# Altium PCB HU_revC.PcbDoc (part 2 of 5)
Units mm, origin at the board's own origin, x right, y up, seen from the top; angles counter-clockwise.
Board outline 391 x 236 mm, 6 copper layers (Top Layer, Layer 1, Layer 2, Layer 3, Layer 4, Bottom Layer), stack 1.538 mm thick; 737 components, 574 nets, 2599 pads, 143 vias.
Unrouted connection lines stored in the file: 1682.
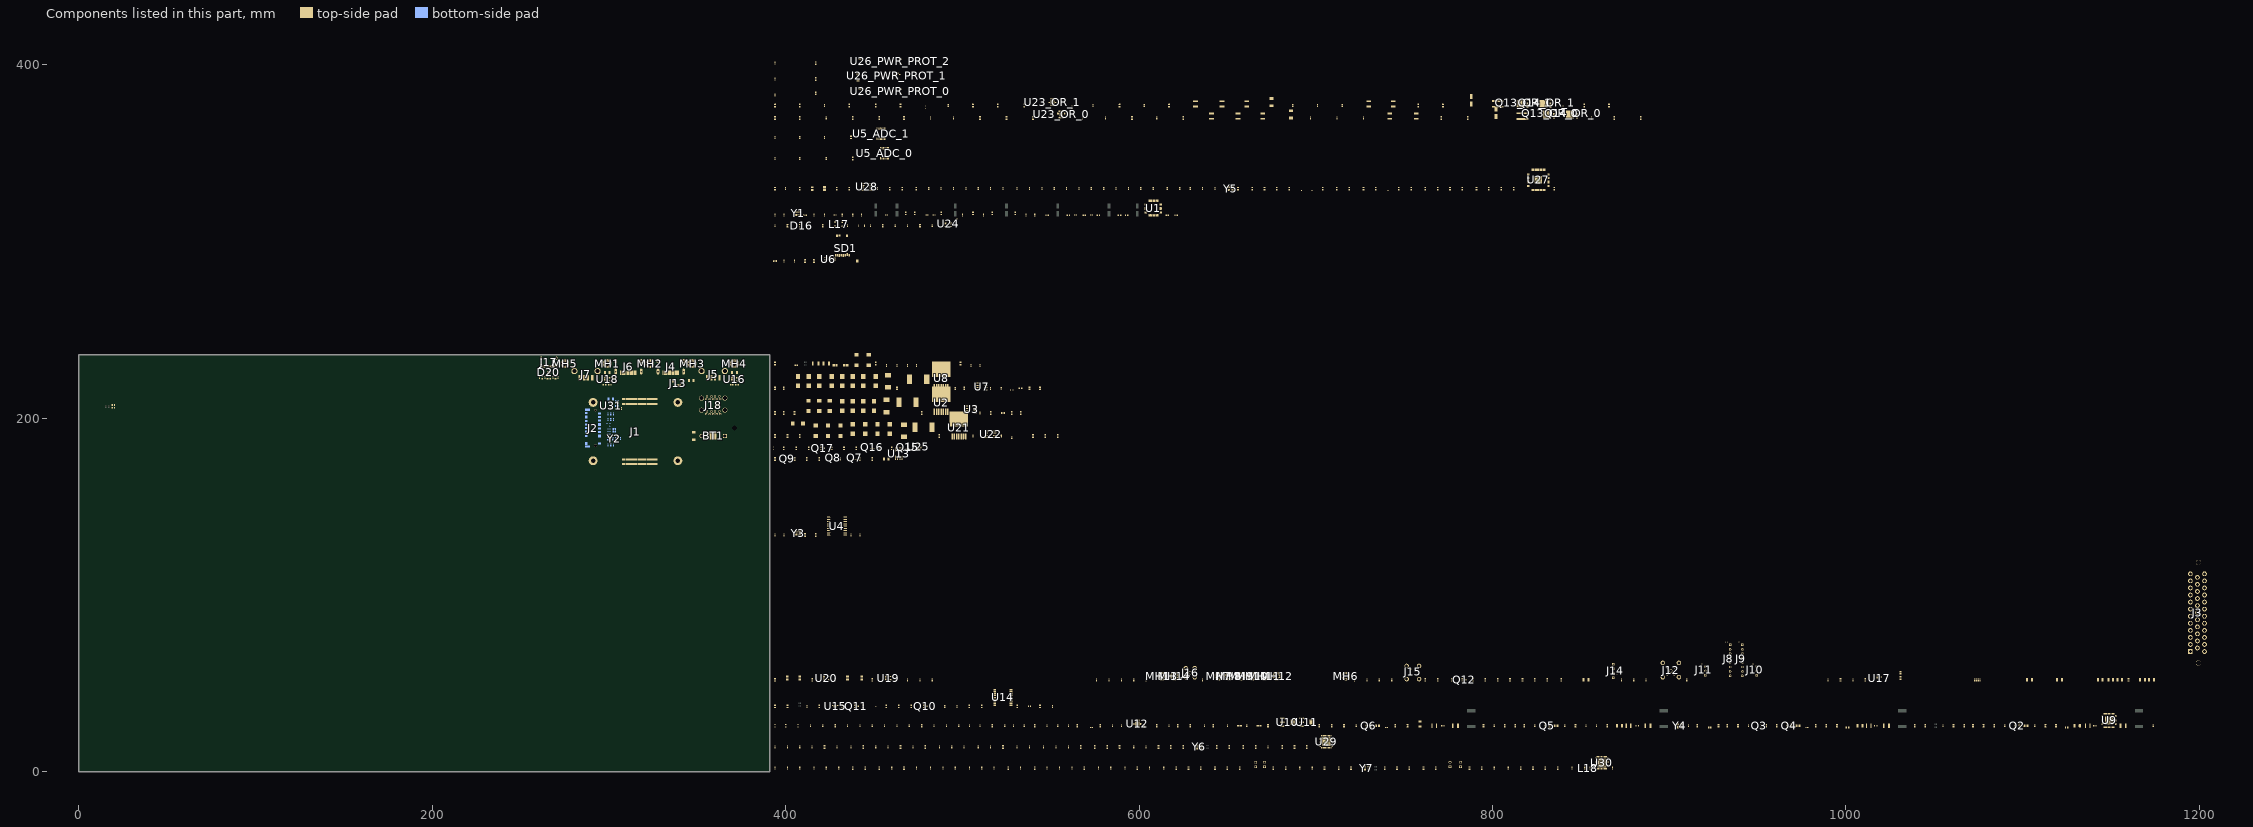
[diagram p2: the components of this part, seen from the top]

## Components (designator, comment, footprint, x,y, rotation, side; value= is the part's Value field where it differs from the comment) (continued)
R110 "0" R0603B 610.001,26 r90 top
R111 "0" R0603B 603.001,26 r90 top
R112 "0" R0603B 578.001,26 r90 top
R113 "100k" R0603B 565.001,26 r90 top
R114 "0" R0603B 541.001,26 r90 top
R115 "100k" R0603B 517.001,26 r90 top
R116 "0" R0603B 477.001,26 r90 top
R117 "TBD" R0603B 428.001,26 r90 top value=100k
R118 "1k" R0603B 449.001,177 r90 top
R119 "100k" R0603B 442.001,177 r90 top
R120 "100k" R0603B 419.001,177 r90 top
R121 "1k" R0603B 412.001,177 r90 top
R122 "1k" R0603B 405.001,177 r90 top
R123 "100k" R0603B 394.001,177 r90 top
R124 "0402 JUMPER" RESC1005X40X25ML05T05 551.001,37 r90 top
R125 "100k" R0603B 544.001,37 r90 top
R126 "1k" R0603B 531.001,37 r90 top
R127 "100k" R0603B 511.001,37 r90 top
R128 "10" R0603B 504.001,37 r90 top
R129 "560" R0603B 471.001,37 r90 top
R130 "100k" R0603B 464.001,37 r90 top
R131 "100k" R0603B 457.001,37 r90 top
R132 "1k" R0603B 444.001,37 r90 top
R133 "100k" R0603B 432.001,37 r90 top
R134 "1k" R0603B 419.001,37 r90 top
R135 "1k" R0603B 401.001,37 r90 top
R136 "1k" R0603B 394.001,37 r90 top
R137 "1k" R0603B 1160.001,52 r90 top
R138 "1k" R0603B 372.5,219 r0 top
R139 "100k" R0603B 369.5,219 r0 top
R140 "0402 JUMPER" RESC1005X40X25ML05T05 1076,52 r90 top
R141 "0402 JUMPER" RESC1005X40X25ML05T05 1075.001,52 r90 top
R142 "0402 JUMPER" RESC1005X40X25ML05T05 1074,52 r90 top
R143 "0402 JUMPER" RESC1005X40X25ML05T05 1073,52 r90 top
R144 "1k" R0603B 1031,56 r270 top
R145 "ERT-J1VR103J" RESC1608X90X30ML15T20 1031.001,53 r90 top
R146 "0402 JUMPER" RESC1005X40X25ML05T05 1023.001,52 r90 top
R147 "100k" R0603B 1011.001,52 r90 top
R148 "0402 JUMPER" RESC1005X40X25ML05T05 1004.001,52 r90 top
R149 "17.5k" R0603B 997.001,52 r90 top value=100k
R150 "1k" R0603B 300.5,219 r0 top
R151 "100k" R0603B 297.5,219 r0 top
R152 "0" R0603B 831.001,52 r90 top
R153 "1k" R0603B 839.001,52 r90 top
R154 "100k" R0603B 817.001,52 r90 top
R155 "100k" R0603B 824.001,52 r90 top
R156 "1k" R0603B 803.001,52 r90 top
R157 "1k" R0603B 810.001,52 r90 top
R158 "DNP" R0603B 796.001,52 r90 top
R159 "1k" R0603B 789.001,52 r90 top
R160 "100k" R0603B 769.001,52 r90 top
R161 "100k" R0603B 777.001,52 r90 top
R162 "100k" R0603B 762.001,52 r90 top
R163 "0402 JUMPER" RESC1005X40X25ML05T05 604.001,52 r90 top
R164 "0402 JUMPER" RESC1005X40X25ML05T05 597.001,52 r90 top
R165 "27" R0603B 266.75,223 r270 top
R166 "27" R0603B 265.25,223 r270 top
R167 "0402 JUMPER" RESC1005X40X25ML05T05 271.25,223 r90 top
R168 "0402 JUMPER" RESC1005X40X25ML05T05 260.75,223 r90 top
R169 "DNP" R0603B 269.75,223 r270 top
R170 "DNP" R0603B 262.25,223 r270 top
R171 "0402 JUMPER" RESC1005X40X25ML05T05 483.001,52 r90 top
R172 "0402 JUMPER" RESC1005X40X25ML05T05 476.001,52 r90 top
R173 "0402 JUMPER" RESC1005X40X25ML05T05 469.001,52 r90 top
R174 "0402 JUMPER" RESC1005X40X25ML05T05 462.001,52 r90 top
R175 "1k" R0603B 449.001,52 r90 top
R176 "100k" R0603B 428.001,52 r90 top
R177 "1k" R0603B 415.001,52 r90 top
R178 "100k" R0603B 394.001,52 r90 top
R179 "1k" R0603B 554.001,190 r90 top
R180 "DNP" R0603B 547.001,190 r90 top
R181 "ERT-J1VR103J" RESC1608X90X30ML15T20 540.001,190 r90 top
R182 "DNP" RESC1005X40X25ML05T05 528.001,189 r90 top
R183 "1k" R0603B 487.001,190 r90 top
R184 "100k" R0603B 408.001,190 r90 top
R185 "100k" R0603B 401.001,190 r90 top
R186 "24k" R0603B 394.001,190 r90 top
R187_OR_0 "100k" R0603B 884.001,370 r90 top (schematic designator R187)
R187_OR_1 "100k" R0603B 866.001,377 r90 top (schematic designator R187)
R188_OR_0 "24k" R0603B 869.001,370 r90 top (schematic designator R188)
R188_OR_1 "24k" R0603B 852.001,377 r90 top (schematic designator R188)
R189_OR_0 "KRL6432E-M-R003-F-T1" FP-KRL6432E-MFG 817.001,371 r90 top (schematic designator R189)
R189_OR_1 "KRL6432E-M-R003-F-T1" FP-KRL6432E-MFG 803.001,378 r90 top (schematic designator R189)
R190_OR_0 "DNP" R0603B 771.001,370 r90 top (schematic designator R190)
R190_OR_1 "DNP" R0603B 758.001,377 r90 top (schematic designator R190)
R191_OR_0 "49.9" R0603B 786.001,370 r90 top (schematic designator R191)
R191_OR_1 "49.9" R0603B 772.001,377 r90 top (schematic designator R191)
R192_OR_0 "10" R0603B 625.001,370 r90 top (schematic designator R192)
R192_OR_1 "10" R0603B 617.001,377 r90 top (schematic designator R192)
R193_OR_0 "100k" R0603B 596.001,370 r90 top (schematic designator R193)
R193_OR_1 "100k" R0603B 589.001,377 r90 top (schematic designator R193)
R194_OR_0 "100k" R0603B 540.001,370 r90 top (schematic designator R194)
R194_OR_1 "100k" R0603B 535.001,377 r90 top (schematic designator R194)
R195_OR_0 "100k" R0603B 525.001,370 r90 top (schematic designator R195)
R195_OR_1 "100k" R0603B 520.001,377 r90 top (schematic designator R195)
R196_OR_0 "11.5k" R0603B 510.001,370 r90 top (schematic designator R196)
R196_OR_1 "11.5k" R0603B 506.001,377 r90 top (schematic designator R196)
R197_OR_0 "DNP" R0603B 438.001,370 r90 top (schematic designator R197)
R197_OR_1 "DNP" R0603B 436.001,377 r90 top (schematic designator R197)
R198_OR_0 "5.1k" R0603B 453.001,370 r90 top (schematic designator R198)
R198_OR_1 "5.1k" R0603B 451.001,377 r90 top (schematic designator R198)
R199_OR_0 "8.2k" R0603B 467.001,370 r90 top (schematic designator R199)
R199_OR_1 "8.2k" R0603B 465.001,377 r90 top (schematic designator R199)
R200_OR_0 "100k" R0603B 408.001,370 r90 top (schematic designator R200)
R200_OR_1 "100k" R0603B 408.001,377 r90 top (schematic designator R200)
R201_OR_0 "3.6k" R0603B 394.001,370 r90 top (schematic designator R201)
R201_OR_1 "3.6k" R0603B 394.001,377 r90 top (schematic designator R201)
R202 "100k" R0603B 476.001,309 r90 top
R203 "1k" R0603B 455.001,309 r90 top
R204 "60.4" R0603B 421.001,309 r90 top
R205 "60.4" R0603B 401.001,309 r90 top
R206 "100k" R0603B 460.001,183 r90 top
R207 "100k" R0603B 440.001,183 r90 top
R208 "1k" R0603B 433.001,183 r90 top
R209 "1k" R0603B 426.001,183 r90 top
R210 "100k" R0603B 413.001,183 r90 top
R211 "100k" R0603B 406.001,183 r90 top
R212 "24k" R0603B 399.001,183 r90 top
R213_PWR_PROT_0 "100k" R0603B 417.001,384 r90 top (schematic designator R213)
R213_PWR_PROT_1 "100k" R0603B 417.001,392 r90 top (schematic designator R213)
R213_PWR_PROT_2 "100k" R0603B 417.001,401 r90 top (schematic designator R213)
R214 "90.9k" R0603B 835.001,330 r90 top
R215 "JMP" R0603B 812.001,330 r90 top
R216 "JMP" R0603B 805.001,330 r90 top
R217 "JMP" R0603B 798.001,330 r90 top
R218 "10k" R0603B 791.001,330 r90 top
R219 "JMP" R0603B 776.001,330 r90 top
R220 "JMP" R0603B 783.001,330 r90 top
R221 "JMP" R0603B 769.001,330 r90 top
R222 "JMP" R0603B 762.001,330 r90 top
R223 "JMP" R0603B 754.001,330 r90 top
R224 "JMP" R0603B 747.001,330 r90 top
R225 "JMP" R0603B 734.001,330 r90 top
R226 "DNP" R0603B 704.001,330 r90 top
R227 "DNP" R0603B 712.001,330 r90 top
R228 "10k" R0603B 719.001,330 r90 top
R229 "DNP" R0603B 727.001,330 r90 top
R230 "DNP" R0603B 664.001,330 r90 top
R231 "DNP" R0603B 671.001,330 r90 top
R232 "DNP" R0603B 678.001,330 r90 top
R233 "DNP" R0603B 685.001,330 r90 top
R234 "1M" R0603B 656.001,330 r90 top
R235 "DNP" R0603B 474.001,330 r90 top
R236 "DNP" R0603B 466.001,330 r90 top
R237 "9.53k" R0603B 459.001,330 r90 top
R238 "100k" R0603B 429.001,330 r90 top
R239 "16.9k" R0603B 436.001,330 r90 top
R240 "100k" R0603B 408.001,330 r90 top
R241 "10k" R0603B 394.001,330 r90 top
R242 "100k" R0603B 695.001,14 r90 top
R243 "4.7k" R0603B 688.001,14 r90 top
R244 "4.7k" R0603B 681.001,14 r90 top
R245 "4.7k" R0603B 666.001,14 r90 top
R246 "1k" R0603B 659.001,14 r90 top
R247 "1k" R0603B 651.001,14 r90 top
R248 "1k" R0603B 644.001,14 r90 top
R249 "1k" R0603B 625.001,14 r90 top
R250 "1k" R0603B 618.001,14 r90 top
R251 "1k" R0603B 611.001,14 r90 top
R252 "1k" R0603B 589.001,14 r90 top
R253 "1k" R0603B 582.001,14 r90 top
R254 "1k" R0603B 575.001,14 r90 top
R255 "JUMP" R0603B 567.001,14 r90 top value=0
R256 "JUMP" R0603B 523.001,14 r90 top value=0
R257 "JUMP" R0603B 479.001,14 r90 top value=0
R258 "JUMP" R0603B 465.001,14 r90 top value=0
R259 "6.04k" R0603B 444.001,14 r90 top
R260 "JUMP" R0603B 422.001,14 r90 top value=0
R261 "1k" R0603B 830.001,2 r90 top value=100k
R262 "1k" R0603B 837.001,2 r90 top value=100k
R263 "100k" R0603B 816.001,2 r90 top
R264 "100k" R0603B 823.001,2 r90 top
R265 "100k" R0603B 787.001,2 r90 top
R266 "4.7k" R0603B 794.001,2 r90 top value=100k
R267 "10k" R0603B 768.001,2 r90 top value=100k
R268 "10k" R0603B 761.001,2 r90 top value=100k
R269 "1k" R0603B 746.001,2 r90 top value=100k
R270 "1k" R0603B 753.001,2 r90 top value=100k
R271 "10k" R0603B 739.001,2 r90 top value=100k
R272 "10k" R0603B 720.001,2 r90 top value=100k
R273 "1k" R0603B 713.001,2 r90 top value=100k
R274 "10k" R0603B 705.001,2 r90 top value=100k
R275 "1k" R0603B 683.001,2 r90 top value=100k
R276 "10k" R0603B 676.001,2 r90 top value=100k
R277 "1k" R0603B 657.001,2 r90 top value=100k
R278 "1k" R0603B 643.001,2 r90 top value=100k
R279 "1k" R0603B 650.001,2 r90 top value=100k
R280 "DNP" R0603B 635.001,2 r90 top value=100k
R281 "JUMP" R0603B 628.001,2 r90 top value=0
R282 "JUMP" R0603B 621.001,2 r90 top value=0
R283 "4.7k" R0603B 599.001,2 r90 top value=100k
R284 "JUMP" R0603B 569.001,2 r90 top value=0
R285 "JUMP" R0603B 541.001,2 r90 top value=0
R286 "JUMP" R0603B 526.001,2 r90 top value=0
R287 "JUMP" R0603B 467.001,2 r90 top value=0
R288 "JUMP" R0603B 453.001,2 r90 top value=0
R289 "12.1k" R0603B 438.001,2 r90 top value=100k
R290 "200" R0603B 445.001,2 r90 top value=100k
SD1 "473521001" MOLX-473521001_V 434.001,296 r0 top
SW1 "KXT331LHS" FP-KXT331LHS-MFG 443.001,309 r0 top
TP1 "TPAD6R" "New footprint 1" 299,197 r90 bottom
TP2 "TPAD6R" "New footprint 1" 300.5,197 r90 bottom
TP3 "TPAD6R" "New footprint 1" 300.5,195.5 r90 bottom
TP4 "TPAD6R" "New footprint 1" 451.001,37 r90 top
TP5 "TPAD6R" "New footprint 1" 741.001,329 r90 top
TP6 "TPAD6R" "New footprint 1" 698.001,329 r90 top
TP7 "TPAD6R" "New footprint 1" 692.001,329 r90 top
U1 "CM6206" CQFP50P900X900X160-48N 608.001,319 r0 top
U2 "LM2678S-5.0" KTW0007B_N 488.001,210 r90 top
U3 "ACS711KLCTR-12AB-T" FP-LC-8-IPC_C 505.001,205 r0 top
U4 "MCP2515-I/SO" FP-C04-051-MFG 429.001,139 r0 top
U5_ADC_0 "" MTC16_L 456.001,350 r90 top (schematic designator U5)
U5_ADC_1 "" MTC16_L 454.001,361 r90 top (schematic designator U5)
U6 "AP22804AW5-7" SOT95P285X140-5N 424.001,290 r0 top
U7 "ACS711KLCTR-12AB-T" FP-LC-8-IPC_C 511.001,218 r0 top
U8 "LM2678S-3.3/NOPB" KTW0007B_N 488.001,224 r90 top
U9 "MAX96724FGTN/V+" MAX96724FGTN_V+-Footprint-1 1149.001,29 r0 top
U10 "LD1117S18TR" SOT-223_M 684.001,28 r0 top
U11 "LD1117S12TR" SOT-223_M 695.001,28 r0 top
U12 "PAC1934T-I/JQ" FP-C04-257-MFG 599.001,27 r0 top
U13 "ACS711KLCTR-25AB-T" FP-LC-8-IPC_A 464.001,180 r90 top
U14 "MAX-M10M-00B" MAX-M10M-00B-Footprint-1 523.001,42 r0 top
U15 "LT6000IDCB#TRMPBF" FP-DCB-6-05-08-1715-MFG 428.001,37 r0 top
U16 "AP22804AW5-7" SOT95P285X140-5N 371,222 r0 top
U17 "MC74VHC1G135DFT2G-Q" SOT65P210X110-5N 1019.001,53 r0 top
U18 "AP22804AW5-7" SOT95P285X140-5N 299,222 r0 top
U19 "AP22804AW5-7" SOT95P285X140-5N 458.001,53 r0 top
U20 "AP22804AW5-7" SOT95P285X140-5N 423.001,53 r0 top
U21 "LM2678S-12" KTW0007B_L 498.001,196 r90 top
U22 "ACS711KLCTR-12AB-T" FP-LC-8-IPC_C 516.001,191 r0 top
U23_OR_0 "LM74910HQRGERQ1" QFN50P400X400X100_HS-25N 556.001,372 r90 top (schematic designator U23)
U23_OR_1 "LM74910HQRGERQ1" QFN50P400X400X100_HS-25N 551.001,379 r90 top (schematic designator U23)
U24 "TCAN1146DYYRQ1" TCAN1146DYYRQ1-Footprint-1 492.001,310 r0 top
U25 "ACS711KEXLT-31AB-T" ALEG-EX-12_V 475.001,184 r0 top
U26_PWR_PROT_0 "ACS711KEXLT-15AB-T" ALEG-EX-12_V 465.001,385 r90 top (schematic designator U26)
U26_PWR_PROT_1 "ACS711KEXLT-15AB-T" ALEG-EX-12_V 463.001,394 r90 top (schematic designator U26)
U26_PWR_PROT_2 "ACS711KEXLT-15AB-T" ALEG-EX-12_V 465.001,402 r90 top (schematic designator U26)
U27 "TUSB4041IPAPRQ1" TUSB4041IPAPRQ1-Footprint-1 826.001,335 r0 top
U28 "MCP1726T-ADJE/SN" SOIC-SN8_L 446.001,331 r0 top
U29 "LAN8830-V/PSA" QFN50P700X700X100_HS-49N 706.001,17 r0 top
U30 "LAN8870T-I/PUA" QFN50P700X700X100_HS-49N 862.001,5 r0 top
U31 "AP22804AW5-7" SOT95P285X140-5N 301,207 r90 bottom
Y1 "ABM8G-12.000MHZ-8-B2X-T" FP-ABM8G-MFG 407.001,316 r0 top
Y2 "ASDK-32.768KHZ-LRT" FP-ASDK-MFG 303,188.5 r180 bottom
Y3 "ABM8G-16.000MHZ-4Y-T3" FP-ABM8G-MFG 407.001,135 r0 top
Y4 "ABM8G-25.000MHZ-18-D2Y-T" FP-ABM8G-MFG 906.001,26 r0 top
Y5 "ABM8G-24.000MHZ-18-D2Y-T" FP-ABM8G-MFG 652.001,330 r0 top
Y6 "ABM8G-25.000MHZ-18-D2Y-T" FP-ABM8G-MFG 634.001,14 r0 top
Y7 "ABM8G-25.000MHZ-18-D2Y-T" FP-ABM8G-MFG 729.001,2 r0 top

## Footprints (in the part's own frame and the unit in brackets; to place one, negate y for a bottom-side part, rotate by r counter-clockwise, add the part's x,y. Pads: shape width x height; smd on the part's side, far side on the other; paste and mask are expansions set on the pad)
48409-0003-Footprint-1 [mil]
  round 48 hole 28 paste-99999 mask-24: 1(-137.8,-172.44) 2(-39.37,-172.44) 3(39.37,-172.44) 4(137.8,-172.44) 5(157.48,-113.39) 6(78.74,-113.39) 7(0,-113.39) 8(-78.74,-113.39) 9(-157.48,-113.39) 10(-137.8,162.6) 11(-39.37,162.6) 12(39.37,162.6) 13(137.8,162.6) 14(157.48,221.65) 15(78.74,221.65) 16(0,221.65) 17(-78.74,221.65) 18(-157.48,221.65)
  round 111 hole 91 paste-99999 mask-55.5: 19(-258.66,133.86) 20(258.66,133.86) 21(-258.66,-133.86) 22(258.66,-133.86)
  silkscreen extent -296,-318 296,317, body extent -307,-307 307,307, height 590
208658-1052-Footprint-1 [mm]
  rect 0.298x2.6 smd mask+0.064: 1(4.5,10.31) 2(4,10.31) 3(3.5,10.31) 4(3,10.31) 5(2.5,10.31) 6(2,10.31) 7(1.5,10.31) 8(1,10.31) 9(0.5,10.31) 10(0,10.31) 11(-0.5,10.31) 12(-1,10.31) 13(-1.5,10.31) 14(-2,10.31) 15(-2.5,10.31) 16(-3,10.31) 17(-3.5,10.31) 18(-4,10.31) 19(-4.5,10.31)
  oval 1.5x3.3 hole 0.9 slot 2.7 at 90 deg mask+0.064: SH1(7.25,9.55) SH2(-7.25,9.55)
  oval 1.5x2.3 hole 0.9 slot 1.7 at 90 deg mask+0.064: SH3(7.25,3.59) SH4(-7.25,3.59)
  silkscreen extent -7.65,0 7.65,13.08, body extent -7.5,-1.02 7.5,11.13, height 16.1
12402012E212A-Footprint-1 [mm]
  rect 0.6x1.14 smd: A1_B12(-3.2,4.75) A4_B9(-2.4,4.75) B1_A12(3.2,4.75) B4_A9(2.4,4.75)
  rect 0.3x1.14 smd: A5(-1.25,4.75) A6(-0.25,4.75) A7(0.25,4.75) A8(1.25,4.75) B5(1.75,4.75) B6(0.75,4.75) B7(-0.75,4.75) B8(-1.75,4.75)
  oval 1.05x2.1 hole 0.6 slot 1.7 at 90 deg: SH1(-4.32,4.18) SH2(4.32,4.18)
  oval 0.9x1.8 hole 0.6 slot 1.4 at 90 deg: SH3(-4.32,0) SH4(4.32,0)
  round 0.65 hole 0.65 unplated: ""(-2.89,3.68) ""(2.89,3.68)
  silkscreen extent -4.47,-2.6 4.47,2.81, body extent -4.46,-2.62 4.47,4.98, height 3.23
9774025243 [mm] "SMT Steel Spacer with internal Thread M2, height 2.5mm"
  round 5.3 / inner round 0 / far side round 0 hole 3 unplated: 1(0,0)
  body extent -2.17,-2.16 2.18,2.16, height 2.5
ALEG-EX-12_V [mm] "QFN, 12-Leads, Body 3x3mm, Height 0.8mm"
  rect 0.5x0.3 smd paste-0.5 mask-0.5: 1(-1.348,0.682) 2(-1.348,0.301) 3(-1.348,-0.318) 4(-1.348,-0.699)
  rect 0.3x0.85 smd: 5(0.148,-1.45) 6(0.648,-1.45) 11(0.648,1.45) 12(0.148,1.45)
  rect 0.85x0.3 smd: 7(1.348,-0.75) 8(1.348,-0.25) 9(1.348,0.25) 10(1.348,0.75)
  Top Layer region: -2.002,0.1 -0.702,0.1 -0.702,0.9 -2.002,0.9
  Top Layer region: -2.002,-0.9 -0.702,-0.9 -0.702,-0.1 -2.002,-0.1
  silkscreen extent -2.68,-1.5 1.5,1.5, body extent -1.5,-1.5 1.5,1.5, height 0.81
CQFP50P900X900X160-48N [mm] "CQFP, 48-Leads, Body 9.00x9.00mm, Pitch 0.50mm, IPC Medium Density"
  oval 1.4x0.3 smd: 1(-4.2,2.75) 2(-4.2,2.25) 3(-4.2,1.75) 4(-4.2,1.25) 5(-4.2,0.75) 6(-4.2,0.25) 7(-4.2,-0.25) 8(-4.2,-0.75) 9(-4.2,-1.25) 10(-4.2,-1.75) 11(-4.2,-2.25) 12(-4.2,-2.75) 25(4.2,-2.75) 26(4.2,-2.25) 27(4.2,-1.75) 28(4.2,-1.25) 29(4.2,-0.75) 30(4.2,-0.25) 31(4.2,0.25) 32(4.2,0.75) 33(4.2,1.25) 34(4.2,1.75) 35(4.2,2.25) 36(4.2,2.75)
  oval 0.3x1.4 smd: 13(-2.75,-4.2) 14(-2.25,-4.2) 15(-1.75,-4.2) 16(-1.25,-4.2) 17(-0.75,-4.2) 18(-0.25,-4.2) 19(0.25,-4.2) 20(0.75,-4.2) 21(1.25,-4.2) 22(1.75,-4.2) 23(2.25,-4.2) 24(2.75,-4.2) 37(2.75,4.2) 38(2.25,4.2) 39(1.75,4.2) 40(1.25,4.2) 41(0.75,4.2) 42(0.25,4.2) 43(-0.25,4.2) 44(-0.75,4.2) 45(-1.25,4.2) 46(-1.75,4.2) 47(-2.25,4.2) 48(-2.75,4.2)
  silkscreen extent -4.32,-3.1 3.1,3.57, body extent -3.5,-3.5 3.5,3.5, height 1.6
DIOD-SOT323-3_V [mm] "SOT323, 3-Leads, Body 2.2x1.35mm, Pitch 0.65mm"
  rect 0.9x0.7 smd: 1(-0.95,0.65) 2(-0.95,-0.65) 3(0.95,0)
  silkscreen extent -1.07,-1.1 0.67,1.67, body extent -1.1,-1.1 1.1,1.1, height 1.07
E6S20A-40MT5-Z-Footprint-1 [mm]
  round 1 hole 0.7: 1(-1,0) 2(1,0)
  round 2.5 hole 1.74: 3(-3.5,-5.63) 3(-3.5,1.87) 3(3.5,-5.63) 3(3.5,1.87)
  round 0.025 smd: 3(-3.475,-0.8) 3(0,2.6) 3(3.475,-0.8)
  Top Layer region: -1.1,2.1 1.1,2.1 1.1,3.1 -1.1,3.1
  Top Layer region: -2.3,-1.805 -4.65,-1.805 -4.655,-1.8 -4.655,0.2 -4.647,0.204 -2.99,0.204 -2.985,0.198 -2.992,0.099 -2.995,0 -2.995,0 -2.814,-0.829 -2.305,-1.508 -2.305,-1.508 -2.295,-1.532
  Top Layer region: 2.3,-1.805 4.65,-1.805 4.655,-1.8 4.655,0.2 4.647,0.204 2.99,0.204 2.985,0.198 2.992,0.099 2.995,0 2.995,0 2.814,-0.829 2.305,-1.508 2.305,-1.508 2.295,-1.532
  body extent -5.5,-7.04 5.5,14.86, height 12.8
FA1-NDRP-PCB-8-Footprint-1 [mil]
  round 75 hole 46: 1(0,0)
  round 100 hole 67: 2(-100,-100) 2(-100,100) 2(100,-100) 2(100,100)
  silkscreen extent -175,-175 175,250, body extent -157,-183 157,758, height 421
FAIR-SOT23-6_V [mm] "SOT23, 6-Leads, Body 2.9x1.6mm, Pitch 0.95mm"
  rect 1x0.7 smd: 1(-1.3,0.95) 2(-1.3,0) 3(-1.3,-0.95) 4(1.3,-0.95) 5(1.3,0) 6(1.3,0.95)
  silkscreen extent -1.42,-1.5 0.4,1.97, body extent -1.4,-1.45 1.4,1.45, height 1.45
FM4-NZRP-PCB-1-Footprint-1 [mm]
  round 1.2 hole 0.7: 1(-1.91,-2) 2(2.09,-2) 3(2.09,2) 4(-1.91,2)
  round 2.1 hole 1.4: MH1(0,0)
  round 2.55 hole 1.7: MH2(-3.5,-4.575) MH3(4.6,-4.575) MH4(4.6,4.575) MH5(-3.5,4.575)
  silkscreen extent -5.9,-6.5 17.25,6.5, body extent -4.76,-5.99 17.8,5.99, height 15.79
FP-1-2199230-6-MFG [mm]
  rect 0.3x1.55 smd paste+0 mask+0: 1(-9.25,3.9) 2(-9,-3.65) 3(-8.75,3.9) 4(-8.5,-3.65) 5(-8.25,3.9) 6(-8,-3.65) 7(-7.75,3.9) 8(-7.5,-3.65) 9(-7.25,3.9) 10(-7,-3.65) 11(-6.75,3.9) 12(-6.5,-3.65) 13(-6.25,3.9) 14(-6,-3.65) 15(-5.75,3.9) 16(-5.5,-3.65) 17(-5.25,3.9) 18(-5,-3.65) 19(-4.75,3.9) 20(-4.5,-3.65) 21(-4.25,3.9) 22(-4,-3.65) 23(-3.75,3.9) 24(-3.5,-3.65) 25(-3.25,3.9) 26(-3,-3.65) 27(-2.75,3.9) 28(-2.5,-3.65) 29(-2.25,3.9) 30(-2,-3.65) 31(-1.75,3.9) 32(-1.5,-3.65) 33(-1.25,3.9) 34(-1,-3.65) 35(-0.75,3.9) 36(-0.5,-3.65) 37(-0.25,3.9) 38(0,-3.65) 39(0.25,3.9) 40(0.5,-3.65) 41(0.75,3.9) 42(1,-3.65) 43(1.25,3.9) 44(1.5,-3.65) 45(1.75,3.9) 46(2,-3.65) 47(2.25,3.9) 48(2.5,-3.65) 49(2.75,3.9) 50(3,-3.65) 51(3.25,3.9) 52(3.5,-3.65) 53(3.75,3.9) 54(4,-3.65) 55(4.25,3.9) 56(4.5,-3.65) 57(4.75,3.9) 58(5,-3.65) 67(7.25,3.9) 68(7.5,-3.65) 69(7.75,3.9) 70(8,-3.65) 71(8.25,3.9) 72(8.5,-3.65) 73(8.75,3.9) 74(9,-3.65) 75(9.25,3.9)
  rect 1.2x2.75 smd paste+0 mask+0: 76(-10.35,3.125) 77(10.35,3.125)
  round 1.1 hole 1.1 unplated paste-2539.97 mask+0: ""(-10,-1.375)
  round 1.6 hole 1.6 unplated paste-2539.97 mask+0: ""(10,-1.375)
  silkscreen extent -11,-3.98 11,5.35, body extent -10.95,-4.23 10.95,4.47, height 4.21
FP-0402-L_1_0_0_05-W_0_5-IPC_A [mm]
  rect 0.715x0.672 smd paste+0 mask+0: 1(-0.479,0) 2(0.479,0)
  silkscreen extent -0.84,-0.74 0.84,0.74, body extent -1.04,-0.54 1.04,0.54, height 0.25
FP-0603-L_1_6_0_2-W_0_8_0-MFG [mm]
  rect 0.7x0.7 smd paste+0 mask+0: 1(-0.7,0) 2(0.7,0)
  silkscreen extent -0.9,-0.82 0.9,0.82, body extent -1.15,-0.6 1.15,0.6, height 0.25
FP-0685T-MFG [mm]
  rect 1.14x1.78 smd paste+0 mask+0: 1(-1.33,0) 2(1.33,0)
  silkscreen extent -0.39,-0.89 0.39,0.89, body extent -1.6,-0.79 1.6,0.79, height 0.83
FP-1210-L_3_3_0_4-W_2_5_0-MFG [mm]
  rect 1x2.5 smd paste+0 mask+0: 1(-1.5,0) 2(1.5,0)
  silkscreen extent -0.62,-1.4 0.62,1.4, body extent -2.1,-1.5 2.1,1.5, height 0.25
FP-1210L050YR-MFG [mm]
  rect 1x2.5 smd paste+0 mask+0: 1(-1.5,0) 2(1.5,0)
  silkscreen extent -0.63,-1.4 0.63,1.4, body extent -2.1,-1.5 2.1,1.5, height 0.25
FP-1210POC-MFG [mm]
  rect 0.65x2.65 smd paste+0 mask+0: 1(-1.27,0) 2(1.27,0)
  silkscreen extent -0.57,-1.34 0.57,1.34, body extent -1.75,-1.44 1.75,1.44, height 0.25
FP-292303-7-MFG [mm]
  rect 3x1.25 smd paste+0 mask+0: 1(6.96,3.5) 2(6.96,1) 3(6.96,-1) 4(6.96,-3.5)
  round 3.5 hole 2.3 paste-2539.97 mask+0: 5(3.28,6.57) 6(3.28,-6.57)
  silkscreen extent 5.4,-7.47 9.15,7.47, body extent -7.1,-8.42 8.56,8.42, height 0.25
FP-776163-1-MFG [mm]
  rect 2.65x2.65 hole 1.75 paste-2539.97 mask+0: 1(-22,16.95)
  round 2.65 hole 1.75 paste-2539.97 mask+0: 2(-18,16.95) 3(-14,16.95) 4(-10,16.95) 5(-6,16.95) 6(-2,16.95) 7(2,16.95) 8(6,16.95) 9(10,16.95) 10(14,16.95) 11(18,16.95) 12(22,16.95) 13(-20,12.95) 14(-16,12.95) 15(-12,12.95) 16(-8,12.95) 17(-4,12.95) 18(0,12.95) 19(4,12.95) 20(8,12.95) 21(12,12.95) 22(16,12.95) 23(20,12.95) 24(-22,8.95) 25(-18,8.95) 26(-14,8.95) 27(-10,8.95) 28(-6,8.95) 29(-2,8.95) 30(2,8.95) 31(6,8.95) 32(10,8.95) 33(14,8.95) 34(18,8.95) 35(22,8.95)
  round 2.85 hole 2.85 unplated paste-2539.97 mask+0: ""(-28.5,12.45) ""(28.5,12.45)
  silkscreen extent -39.17,4.1 38.55,19.15, body extent -38.65,-19.25 38.65,19.25, height 0.25
FP-826629-2-MFG [mm]
  rect 1.55x1.55 hole 1 paste-2539.97 mask+0: 1(-1.27,0)
  round 1.55 hole 1 paste-2539.97 mask+0: 2(1.27,0)
  silkscreen extent -3.3,-1.35 2.64,1.35, body extent -2.74,-1.45 2.74,1.45, height 0.25
FP-470531000-MFG [mm]
  rect 1.57x1.57 hole 1.02 paste-2539.97 mask+0: 1(3.81,-0.38)
  round 1.57 hole 1.02 paste-2539.97 mask+0: 2(1.27,-0.38) 3(-1.27,-0.38) 4(-3.81,-0.38)
  round 1.25 hole 1.25 unplated paste-2539.97 mask+0: ""(-1.27,-2.54)
  silkscreen extent -5.2,-3.02 5.92,3.02, body extent -5.3,-3.26 5.3,3.12, height 0.25
FP-ABM8G-MFG [mm]
  rect 1.4x1.2 smd paste+0 mask+0: 1(-1.1,-0.85) 2(1.1,-0.85) 3(1.1,0.85) 4(-1.1,0.85)
  silkscreen extent -2.47,-1.83 1.6,1.83, body extent -1.9,-1.55 1.9,1.55, height 0.25
FP-AC1210-0_85-MFG [mm]
  rect 1x2.7 smd paste+0 mask+0: 1(-1.5,0) 2(1.5,0)
  silkscreen extent -0.63,-1.35 0.63,1.35, body extent -2.2,-1.7 2.2,1.7, height 0.25
FP-ACT1210G-800-2P-TL10-MFG [mm]
  rect 1.05x0.6 smd paste+0 mask+0: 1(-1.525,0.5) 2(-1.525,-0.5) 3(1.525,-0.5) 4(1.525,0.5)
  silkscreen extent -2.72,-1.35 1.7,1.35, body extent -2.15,-1.45 2.15,1.45, height 0.25
FP-ASDK-MFG [mm]
  rect 1x0.9 smd paste+0 mask+0: 1(-0.813,-0.613) 2(0.813,-0.613) 3(0.813,0.613) 4(-0.813,0.613)
  silkscreen extent -1.7,-1.76 1.7,1.05, body extent -1.25,-1 1.25,1, height 0.95
FP-B3B-XH-AM_LF_SN-MFG [mm]
  rect 1.4x1.4 hole 0.9 paste-2539.97 mask+0: 1(-2.5,-0.525)
  round 1.4 hole 0.9 paste-2539.97 mask+0: 2(0,-0.525) 3(2.5,-0.525)
  round 1.1 hole 1.1 unplated paste-2539.97 mask+0: ""(4.1,1.475)
  silkscreen extent -5.55,-2.88 4.95,2.88, body extent -5.05,-2.98 5.05,2.98, height 0.25
FP-B8B-XH-AM_LF_SN-MFG [mm]
  rect 1.4x1.4 hole 0.9 paste-2539.97 mask+0: 1(8.75,-0.525)
  round 1.4 hole 0.9 paste-2539.97 mask+0: 2(6.25,-0.525) 3(3.75,-0.525) 4(1.25,-0.525) 5(-1.25,-0.525) 6(-3.75,-0.525) 7(-6.25,-0.525) 8(-8.75,-0.525)
  round 1.1 hole 1.1 unplated paste-2539.97 mask+0: ""(10.35,1.475)
  silkscreen extent -11.2,-2.88 11.92,2.88, body extent -11.3,-2.98 11.3,2.98, height 0.25
FP-BM04B-SRSS-TBT_LF_SN-MFG [mm]
  rect 0.6x1.55 smd paste+0 mask+0: 1(-1.5,-1.775) 2(-0.5,-1.775) 3(0.5,-1.775) 4(1.5,-1.775)
  rect 1.2x1.8 smd paste+0 mask+0: 5(-2.8,0.75) 6(2.8,0.75)
  silkscreen extent -3,-3.32 3,1.45, body extent -3.5,-2.65 3.5,1.75, height 0.25
FP-C04-051-MFG [mm]
  rrect100% 1.9x0.6 smd paste+0 mask+0: 1(-4.7,5.08) 2(-4.7,3.81) 3(-4.7,2.54) 4(-4.7,1.27) 5(-4.7,0) 6(-4.7,-1.27) 7(-4.7,-2.54) 8(-4.7,-3.81) 9(-4.7,-5.08) 10(4.7,-5.08) 11(4.7,-3.81) 12(4.7,-2.54) 13(4.7,-1.27) 14(4.7,0) 15(4.7,1.27) 16(4.7,2.54) 17(4.7,3.81) 18(4.7,5.08)
  silkscreen extent -6.42,-5.87 3.8,5.87, body extent -5.75,-6.12 5.75,6.12, height 0.25
FP-C04-257-MFG [mm]
  rrect100% 0.8x0.35 smd paste+0 mask+0: 1(-2,0.975) 2(-2,0.325) 3(-2,-0.325) 4(-2,-0.975) 9(2,-0.975) 10(2,-0.325) 11(2,0.325) 12(2,0.975)
  rrect100% 0.35x0.8 smd paste+0 mask+0: 5(-0.975,-2) 6(-0.325,-2) 7(0.325,-2) 8(0.975,-2) 13(0.975,2) 14(0.325,2) 15(-0.325,2) 16(-0.975,2)
  rect 2.7x2.7 smd paste+0 mask+0: 17(0,0)
  silkscreen extent -3.1,-2.1 2.1,2.1, body extent -2.5,-2.5 2.5,2.5, height 0.25
FP-C0805C475J4RACAUTO-MFG [mm]
  rect 0.95x1.35 smd paste+0 mask+0: 1(-0.75,0) 2(0.75,0)
  silkscreen extent -1.15,-1.05 1.15,1.05, body extent -1.4,-0.85 1.4,0.85, height 0.25
FP-C3225-250-0_4-MFG [mm]
  rect 1.1x2.2 smd paste+0 mask+0: 1(-1.65,0) 2(1.65,0)
  silkscreen extent -0.72,-1.4 0.72,1.4, body extent -2.3,-1.5 2.3,1.5, height 0.25
FP-DCB-6-05-08-1715-MFG [mm]
  rect 0.7x0.25 smd paste+0 mask+0: 1(-1.425,0.5) 2(-1.425,0) 3(-1.425,-0.5) 4(1.425,-0.5) 5(1.425,0) 6(1.425,0.5)
  rect 1.65x1.35 smd paste+0 mask+0: 7(0,0)
  silkscreen extent -2.57,-1.05 1.55,1.05, body extent -1.88,-1.15 1.88,1.15, height 0.25
FP-DQA0010A-MFG [mm]
  rrect50% 0.565x0.2 smd paste+0 mask+0: 1(-0.417,1) 2(-0.417,0.5) 4(-0.417,-0.5) 5(-0.417,-1) 6(0.417,-1) 7(0.417,-0.5) 9(0.417,0.5) 10(0.417,1)
  rrect25% 0.565x0.4 smd paste-1000 mask+0: 3(-0.417,0) 8(0.417,0)
  silkscreen extent -1.37,-1.48 0.55,1.48, body extent -0.8,-1.4 0.8,1.4, height 0.25
FP-FKC-MFG [mm]
  rect 2.8x1.6 smd paste+0 mask+0: 1(-2.15,0) 2(2.15,0)
  silkscreen extent -4.22,-2.75 2.75,2.75, body extent -3.8,-3 3.8,3, height 0.25
FP-GRM21B-0_2-e0_2_0_7-IPC_B [mm]
  rect 1.255x1.456 smd paste+0 mask+0: 1(-0.826,0) 2(0.826,0)
  silkscreen extent -1.45,-1.13 1.45,1.13, body extent -1.7,-0.98 1.7,0.98, height 0.25
FP-GRM188-0_1-e0_2_0_55-IPC_A [mm]
  rect 1.208x1.012 smd paste+0 mask+0: 1(-0.802,0) 2(0.802,0)
  silkscreen extent -1.41,-0.91 1.41,0.91, body extent -1.91,-1.01 1.91,1.01, height 0.25
FP-KRL6432E-MFG [mm]
  rect 1x6.6 smd paste+0 mask+0: 1(-1.6,0) 2(1.6,0)
  silkscreen extent -0.72,-3.25 0.72,3.25, body extent -2.2,-3.4 2.2,3.4, height 0.25
FP-KXT331LHS-MFG [mm]
  rect 0.55x1.5 smd paste+0 mask+0: 1(-1.625,0) 2(1.625,0)
  silkscreen extent -1.65,-1.15 1.65,1.15, body extent -2,-1.25 2,1.25, height 0.25
FP-LC-8-IPC_A [mm]
  rect 2.474x0.622 smd paste+0 mask+0: 1(-2.416,1.905)
  rrect100% 2.474x0.622 smd paste+0 mask+0: 2(-2.416,0.635) 3(-2.416,-0.635) 4(-2.416,-1.905) 5(2.416,-1.905) 6(2.416,-0.635) 7(2.416,0.635) 8(2.416,1.905)
  silkscreen extent -4.37,-2.45 0.68,2.45, body extent -4.15,-2.95 4.15,2.95, height 0.25
FP-LC-8-IPC_C [mm]
  rect 1.874x0.542 smd paste+0 mask+0: 1(-2.316,1.905)
  rrect100% 1.874x0.542 smd paste+0 mask+0: 2(-2.316,0.635) 3(-2.316,-0.635) 4(-2.316,-1.905) 5(2.316,-1.905) 6(2.316,-0.635) 7(2.316,0.635) 8(2.316,1.905)
  silkscreen extent -3.97,-2.45 0.88,2.45, body extent -3.35,-2.55 3.35,2.55, height 0.25
FP-LQW18AN_00-MFG [mm]
  rect 0.625x0.85 smd paste+0 mask+0: 1(-0.663,0) 2(0.663,0)
  silkscreen extent -0.9,-0.82 0.9,0.82, body extent -1.07,-0.6 1.07,0.6, height 0.25
FP-PFL1609-MFG [mm]
  rect 0.64x1.02 smd paste+0 mask+0: 1(-0.635,0) 2(0.635,0)
  silkscreen extent -0.9,-0.89 0.9,0.89, body extent -1.05,-0.64 1.05,0.64, height 0.25
FP-PG-TDSON-8-MFG [mm]
  rect 3.2x1.1 smd paste-1000 mask-1000: 1-2-3(-0.715,-2.775)
  rect 0.5x1.1 smd paste-1000 mask+0: 4(1.905,-2.775)
  rect 4.41x4.55 smd paste-1000 mask-1000: 5-6-7-8(0,1.05)
  silkscreen extent -2.78,-4.08 2.78,3.08, body extent -2.82,-3.42 2.82,3.42, height 0.25
FP-SF-1206FP-MFG [mm]
  rect 1.25x1.65 smd paste+0 mask+0: 1(-1.725,0) 2(1.725,0)
  silkscreen extent -0.72,-0.82 0.72,0.82, body extent -2.45,-0.92 2.45,0.92, height 0.25
FP-SMB-CA-MFG [mm]
  rect 1.62x2.18 smd paste+0 mask+0: 1(-2.11,0) 2(2.11,0)
  silkscreen extent -2.3,-1.97 2.3,1.97, body extent -3.02,-2.07 3.02,2.07, height 0.25
FP-SMC-MFG [mm]
  rect 2.5x3.3 smd paste+0 mask+0: 1(-3.45,0) 2(3.45,0)
  silkscreen extent -4.25,-3.11 3.55,3.11, body extent -4.8,-3.21 4.8,3.21, height 0.25
FP-SOD128-MFG [mm]
  rect 1.4x2.1 smd paste-1000 mask+0: 1(-2.2,0) 2(2.2,0)
  silkscreen extent -3.57,-1.35 1.12,1.35, body extent -3.1,-1.7 3.1,1.7, height 0.25
FP-SOD-123-IPC_A [mm]
  rect 1.308x0.762 smd paste+0 mask+0: 1(-1.825,0)
  rrect100% 1.308x0.762 smd paste+0 mask+0: 2(1.825,0)
  silkscreen extent -2.39,-0.8 1.35,1.01, body extent -2.98,-1.3 2.98,1.3, height 0.25
FP-SOT323-3L-MFG [mm]
  rect 0.7x0.42 smd paste+0 mask+0: 1(-1,0.65) 2(-1,-0.65) 3(1,0)
  silkscreen extent -0.67,-1.1 0.67,1.1, body extent -1.45,-1.2 1.45,1.2, height 0.25
FP-SRF4532-MFG [mm]
  round 0.99 smd paste+0 mask+0: 1(-2.05,-1.25) 2(2.05,-1.25)
  round 0.97 smd paste+0 mask+0: 3(2.05,1.125) 4(-2.05,1.125)
  Top Layer region: -2.6,0.45 -2.6,1.8 -1.5,1.8 -1.5,0.95 -1.9,0.45
  Top Layer region: 1.5,1.8 2.6,1.8 2.6,0.45 1.9,0.45 1.5,0.95
  Top Layer region: 1.5,-1.8 1.5,-0.95 1.9,-0.45 2.6,-0.45 2.6,-1.8
  Top Layer region: -2.6,-1.8 -2.6,-0.45 -1.9,-0.45 -1.5,-0.95 -1.5,-1.8
  silkscreen extent -2.17,-2.47 1.12,1.7, body extent -2.7,-1.9 2.7,1.9, height 0.25
FP-SRR1260-MFG [mm]
  rect 2.9x5.4 smd paste+0 mask+0: 1(-4.85,0) 2(4.85,0)
  silkscreen extent -6.4,-6.4 6.4,6.4, body extent -6.5,-6.5 6.5,6.5, height 0.25
FP-T491X107K025AT-MFG [mm]
  rect 1.99x2.33 smd paste+0 mask+0: 1(-3.01,0) 2(3.01,0)
  silkscreen extent -3.8,-2.3 4.92,2.3, body extent -4.11,-2.4 4.11,2.4, height 0.25
KEMT-T495-D_L [mm] "Molded Capacitor, 2-Leads, Body 7.6x4.6mm, IPC High Density"
  rect 2.2x2.35 smd: 1(-2.925,0) 2(2.925,0)
  silkscreen extent -4.52,-2.3 3.8,2.3, body extent -4.02,-2.3 4.02,2.3, height 3.1
KSTN-3001_V [mm] "THD, 2-Leads, Body 13.21x12.07mm"
  rect 2.35x2.35 hole 1.85: 1(-6.605,0)
  round 2.35 hole 1.85: 2(6.605,0)
  rect 3.96x3.96 smd: 3(0,0)
  silkscreen extent -8.45,-6.73 6.61,5.34, body extent -6.61,-6.73 6.61,5.34, height 3
KTW0007B_L [mm] "DPAK, 7-Leads, Body 9.4x10.4mm, Pitch 1.27mm, IPC High Density"
  rrect11% 3.2x0.9 smd: 1(-6.25,3.81) 2(-6.25,2.54) 3(-6.25,1.27) 4(-6.25,0) 5(-6.25,-1.27) 6(-6.25,-2.54) 7(-6.25,-3.81)
  rrect1% 8.5x10.45 smd: 8(3.6,0)
  silkscreen extent -6.37,-5.2 -1.05,5.2, body extent -3.3,-5.2 6.1,5.2, height 4.65
KTW0007B_N [mm] "DPAK, 7-Leads, Body 9.4x10.4mm, Pitch 1.27mm, IPC Medium Density"
  rrect11% 3.5x0.95 smd: 1(-6.3,3.81) 2(-6.3,2.54) 3(-6.3,1.27) 4(-6.3,0) 5(-6.3,-1.27) 6(-6.3,-2.54) 7(-6.3,-3.81)
  rrect1% 8.8x10.5 smd: 8(3.65,0)
  silkscreen extent -6.42,-5.2 -1.15,5.2, body extent -3.25,-5.2 6.15,5.2, height 4.65
MAX96724FGTN_V+-Footprint-1 [mm]
  oval 0.95x0.25 smd: 1(-3.875,3.25) 2(-3.875,2.75) 3(-3.875,2.25) 4(-3.875,1.75) 5(-3.875,1.25) 6(-3.875,0.75) 7(-3.875,0.25) 8(-3.875,-0.25) 9(-3.875,-0.75) 10(-3.875,-1.25) 11(-3.875,-1.75) 12(-3.875,-2.25) 13(-3.875,-2.75) 14(-3.875,-3.25) 29(3.875,-3.25) 30(3.875,-2.75) 31(3.875,-2.25) 32(3.875,-1.75) 33(3.875,-1.25) 34(3.875,-0.75) 35(3.875,-0.25) 36(3.875,0.25) 37(3.875,0.75) 38(3.875,1.25) 39(3.875,1.75) 40(3.875,2.25) 41(3.875,2.75) 42(3.875,3.25)
  oval 0.25x0.95 smd: 15(-3.25,-3.875) 16(-2.75,-3.875) 17(-2.25,-3.875) 18(-1.75,-3.875) 19(-1.25,-3.875) 20(-0.75,-3.875) 21(-0.25,-3.875) 22(0.25,-3.875) 23(0.75,-3.875) 24(1.25,-3.875) 25(1.75,-3.875) 26(2.25,-3.875) 27(2.75,-3.875) 28(3.25,-3.875) 43(3.25,3.875) 44(2.75,3.875) 45(2.25,3.875) 46(1.75,3.875) 47(1.25,3.875) 48(0.75,3.875) 49(0.25,3.875) 50(-0.25,3.875) 51(-0.75,3.875) 52(-1.25,3.875) 53(-1.75,3.875) 54(-2.25,3.875) 55(-2.75,3.875) 56(-3.25,3.875)
  rect 4.7x4.7 smd: 57(0,0)
  silkscreen extent -4.97,-4.2 4.2,4.2, body extent -4.05,-4.05 4.05,4.05, height 0.8
MAX-M10M-00B-Footprint-1 [mm]
  rect 1.55x0.8 smd: 1(-4.6,4.4) 2(-4.6,3.3) 3(-4.6,2.2) 4(-4.6,1.1) 5(-4.6,0) 6(-4.6,-1.1) 7(-4.6,-2.2) 8(-4.6,-3.3) 9(-4.6,-4.4) 10(4.6,-4.4) 11(4.6,-3.3) 12(4.6,-2.2) 13(4.6,-1.1) 14(4.6,0) 15(4.6,1.1) 16(4.6,2.2) 17(4.6,3.3) 18(4.6,4.4)
  silkscreen extent -5.26,4.91 -5.16,5.01, body extent -4.85,-5.35 4.85,5.05, height 2.7
MOLX-473521001_V [mm] "SMD, 8-Leads, Body 15.2x14mm, Pitch 1.1mm"
  rect 0.8x1.5 smd: 1(1.94,-3.66) 2(0.84,-3.26) 3(-0.26,-3.66) 4(-1.36,-3.86) 5(-2.46,-3.66) 6(-3.56,-3.86) 7(-4.66,-3.66) 8(-5.76,-3.66)
  rect 1x0.95 smd: 9(-3.56,7.425)
  rect 1.3x1.4 smd: 10(-4.95,7.2) 11(0.75,7.2)
  rect 1.4x1.9 smd: 12(6.6,-6.95) 13(-6.55,-5.95)
  silkscreen extent -7,-7.6 7.78,7.6, body extent -7.05,-7.6 7.05,7.6, height 1.85
MTC16_L [mm] "TSOP, 16-Leads, Body 5x4.4mm, Pitch 0.65mm, IPC High Density"
  oval 1.4x0.35 smd: 1(-2.8,2.275) 2(-2.8,1.625) 3(-2.8,0.975) 4(-2.8,0.325) 5(-2.8,-0.325) 6(-2.8,-0.975) 7(-2.8,-1.625) 8(-2.8,-2.275) 9(2.8,-2.275) 10(2.8,-1.625) 11(2.8,-0.975) 12(2.8,-0.325) 13(2.8,0.325) 14(2.8,0.975) 15(2.8,1.625) 16(2.8,2.275)
  silkscreen extent -2.92,-2.55 1.7,3.12, body extent -2.25,-2.55 2.25,2.55, height 1.1
"New footprint 1" [mm]
  round 0.6 smd paste-1: 1(0,0)
NXP-SOT363_L [mm] "SOT23, 6-Leads, Body 2.2x1.35mm, Pitch 0.65mm, IPC High Density"
  rect 0.45x0.35 smd: 1(-0.975,0.65) 2(-0.975,0) 3(-0.975,-0.65) 4(0.975,-0.65) 5(0.975,0) 6(0.975,0.65)
  silkscreen extent -1.1,-1.1 0.35,1.5, body extent -0.67,-1.1 0.67,1.1, height 1.1
ONSC-SOD-523-2-502-01_V [mm] "SOD, 2-Leads, Body 1.2x0.8mm"
  rect 0.48x0.4 smd: 1(-0.66,0) 2(0.66,0)
  silkscreen extent -0.75,-0.4 0.07,0.65, body extent -0.6,-0.4 0.6,0.4, height 0.7
"PTHV6 M2" [mm]
  round 0.5 hole 0.3: 1(-1.9,0) 1(-1.344,-1.344) 1(-1.344,1.344) 1(0,-1.9) 1(0,1.9) 1(1.344,-1.344) 1(1.344,1.344) 1(1.9,0)
  round 5 hole 2.5: 1(0,0)
QFN50P400X400X100_HS-25N [mm] "QFN, 24-Leads, Body 4.00x4.00mm, Pitch 0.50mm, Thermal Pad 2.10x2.10mm, IPC Medium Density"
  oval 0.95x0.25 smd: 1(-1.875,1.25) 2(-1.875,0.75) 3(-1.875,0.25) 4(-1.875,-0.25) 5(-1.875,-0.75) 6(-1.875,-1.25) 13(1.875,-1.25) 14(1.875,-0.75) 15(1.875,-0.25) 16(1.875,0.25) 17(1.875,0.75) 18(1.875,1.25)
  oval 0.25x0.95 smd: 7(-1.25,-1.875) 8(-0.75,-1.875) 9(-0.25,-1.875) 10(0.25,-1.875) 11(0.75,-1.875) 12(1.25,-1.875) 19(1.25,1.875) 20(0.75,1.875) 21(0.25,1.875) 22(-0.25,1.875) 23(-0.75,1.875) 24(-1.25,1.875)
  rect 2.1x2.1 smd: 25(0,0)
  silkscreen extent -2.97,-2.2 2.2,2.2, body extent -2.05,-2.05 2.05,2.05, height 1
QFN50P700X700X100_HS-49N [mm] "QFN, 48-Leads, Body 7.00x7.00mm, Pitch 0.50mm, Thermal Pad 5.05x5.05mm, IPC Medium Density"
  oval 0.85x0.25 smd: 1(-3.4,2.75) 2(-3.4,2.25) 3(-3.4,1.75) 4(-3.4,1.25) 5(-3.4,0.75) 6(-3.4,0.25) 7(-3.4,-0.25) 8(-3.4,-0.75) 9(-3.4,-1.25) 10(-3.4,-1.75) 11(-3.4,-2.25) 12(-3.4,-2.75) 25(3.4,-2.75) 26(3.4,-2.25) 27(3.4,-1.75) 28(3.4,-1.25) 29(3.4,-0.75) 30(3.4,-0.25) 31(3.4,0.25) 32(3.4,0.75) 33(3.4,1.25) 34(3.4,1.75) 35(3.4,2.25) 36(3.4,2.75)
  oval 0.25x0.85 smd: 13(-2.75,-3.4) 14(-2.25,-3.4) 15(-1.75,-3.4) 16(-1.25,-3.4) 17(-0.75,-3.4) 18(-0.25,-3.4) 19(0.25,-3.4) 20(0.75,-3.4) 21(1.25,-3.4) 22(1.75,-3.4) 23(2.25,-3.4) 24(2.75,-3.4) 37(2.75,3.4) 38(2.25,3.4) 39(1.75,3.4) 40(1.25,3.4) 41(0.75,3.4) 42(0.25,3.4) 43(-0.25,3.4) 44(-0.75,3.4) 45(-1.25,3.4) 46(-1.75,3.4) 47(-2.25,3.4) 48(-2.75,3.4)
  rect 5.05x5.05 smd: 49(0,0)
  silkscreen extent -4.42,-3.65 3.65,3.65, body extent -3.5,-3.5 3.5,3.5, height 1
R0603B [mm] "Chip Resistor, 0603, 2-Leads, Body 1.58x0.85mm, IPC Medium Density"
  rrect25% 0.8x0.95 smd: 1(-0.65,0) 2(0.65,0)
  silkscreen extent -0.2,-0.7 0.2,0.7, body extent -0.82,-0.48 0.82,0.48, height 0.5
R1206B [mm] "Chip Resistor, 1206, 2-Leads, Body 3.20x1.60mm, IPC Medium Density"
  rrect25% 1.2x1.75 smd: 1(-1.45,0) 2(1.45,0)
  silkscreen extent -0.6,-1 0.6,1, body extent -1.7,-0.87 1.7,0.87, height 0.6
RESC1005X40X25ML05T05 [mm] "Chip Resistor, 2-Leads, Body 1.00x0.50mm, IPC Low Density"
  rect 0.65x0.65 smd: 1(-0.5,0) 2(0.5,0)
  body extent -0.53,-0.27 0.53,0.28, height 0.4
RESC1608X90X30ML15T20 [mm] "Chip Resistor, 2-Leads, Body 1.60x0.80mm, IPC Low Density"
  rect 0.95x1.05 smd: 1(-0.7,0) 2(0.7,0)
  body extent -0.88,-0.48 0.87,0.48, height 0.9
"RPI CM5 W_ COOLER-Footprint-1" [mm]
  rect 0.2x1.14 smd paste-2 mask+0: 1(31.3,34.82) 2(31.3,32.18) 3(30.9,34.82) 4(30.9,32.18) 5(30.5,34.82) 6(30.5,32.18) 7(30.1,34.82) 8(30.1,32.18) 9(29.7,34.82) 10(29.7,32.18) 11(29.3,34.82) 12(29.3,32.18) 13(28.9,34.82) 14(28.9,32.18) 15(28.5,34.82) 16(28.5,32.18) 17(28.1,34.82) 18(28.1,32.18) 19(27.7,34.82) 20(27.7,32.18) 21(27.3,34.82) 22(27.3,32.18) 23(26.9,34.82) 24(26.9,32.18) 25(26.5,34.82) 26(26.5,32.18) 27(26.1,34.82) 28(26.1,32.18) 29(25.7,34.82) 30(25.7,32.18) 31(25.3,34.82) 32(25.3,32.18) 33(24.9,34.82) 34(24.9,32.18) 35(24.5,34.82) 36(24.5,32.18) 37(24.1,34.82) 38(24.1,32.18) 39(23.7,34.82) 40(23.7,32.18) 41(23.3,34.82) 42(23.3,32.18) 43(22.9,34.82) 44(22.9,32.18) 45(22.5,34.82) 46(22.5,32.18) 47(22.1,34.82) 48(22.1,32.18) 49(21.7,34.82) 50(21.7,32.18) 51(21.3,34.82) 52(21.3,32.18) 53(20.9,34.82) 54(20.9,32.18) 55(20.5,34.82) 56(20.5,32.18) 57(20.1,34.82) 58(20.1,32.18) 59(19.7,34.82) 60(19.7,32.18) 61(19.3,34.82) 62(19.3,32.18) 63(18.9,34.82) 64(18.9,32.18) 65(18.5,34.82) 66(18.5,32.18) 67(18.1,34.82) 68(18.1,32.18) 69(17.7,34.82) 70(17.7,32.18) 71(17.3,34.82) 72(17.3,32.18) 73(16.9,34.82) 74(16.9,32.18) 75(16.5,34.82) 76(16.5,32.18) 77(16.1,34.82) 78(16.1,32.18) 79(15.7,34.82) 80(15.7,32.18) 81(15.3,34.82) 82(15.3,32.18) 83(14.9,34.82) 84(14.9,32.18) 85(14.5,34.82) 86(14.5,32.18) 87(14.1,34.82) 88(14.1,32.18) 89(13.7,34.82) 90(13.7,32.18) 91(13.3,34.82) 92(13.3,32.18) 93(12.9,34.82) 94(12.9,32.18) 95(12.5,34.82) 96(12.5,32.18) 97(12.1,34.82) 98(12.1,32.18) 99(11.7,34.82) 100(11.7,32.18) 101(31.3,0.82) 102(31.3,-1.82) 103(30.9,0.82) 104(30.9,-1.82) 105(30.5,0.82) 106(30.5,-1.82) 107(30.1,0.82) 108(30.1,-1.82) 109(29.7,0.82) 110(29.7,-1.82) 111(29.3,0.82) 112(29.3,-1.82) 113(28.9,0.82) 114(28.9,-1.82) 115(28.5,0.82) 116(28.5,-1.82) 117(28.1,0.82) 118(28.1,-1.82) 119(27.7,0.82) 120(27.7,-1.82) 121(27.3,0.82) 122(27.3,-1.82) 123(26.9,0.82) 124(26.9,-1.82) 125(26.5,0.82) 126(26.5,-1.82) 127(26.1,0.82) 128(26.1,-1.82) 129(25.7,0.82) 130(25.7,-1.82) 131(25.3,0.82) 132(25.3,-1.82) 133(24.9,0.82) 134(24.9,-1.82) 135(24.5,0.82) 136(24.5,-1.82) 137(24.1,0.82) 138(24.1,-1.82) 139(23.7,0.82) 140(23.7,-1.82) 141(23.3,0.82) 142(23.3,-1.82) 143(22.9,0.82) 144(22.9,-1.82) 145(22.5,0.82) 146(22.5,-1.82) 147(22.1,0.82) 148(22.1,-1.82) 149(21.7,0.82) 150(21.7,-1.82) 151(21.3,0.82) 152(21.3,-1.82) 153(20.9,0.82) 154(20.9,-1.82) 155(20.5,0.82) 156(20.5,-1.82) 157(20.1,0.82) 158(20.1,-1.82) 159(19.7,0.82) 160(19.7,-1.82) 161(19.3,0.82) 162(19.3,-1.82) 163(18.9,0.82) 164(18.9,-1.82) 165(18.5,0.82) 166(18.5,-1.82) 167(18.1,0.82) 168(18.1,-1.82) 169(17.7,0.82) 170(17.7,-1.82) 171(17.3,0.82) 172(17.3,-1.82) 173(16.9,0.82) 174(16.9,-1.82) 175(16.5,0.82) 176(16.5,-1.82) 177(16.1,0.82) 178(16.1,-1.82) 179(15.7,0.82) 180(15.7,-1.82) 181(15.3,0.82) 182(15.3,-1.82) 183(14.9,0.82) 184(14.9,-1.82) 185(14.5,0.82) 186(14.5,-1.82) 187(14.1,0.82) 188(14.1,-1.82) 189(13.7,0.82) 190(13.7,-1.82) 191(13.3,0.82) 192(13.3,-1.82) 193(12.9,0.82) 194(12.9,-1.82) 195(12.5,0.82) 196(12.5,-1.82) 197(12.1,0.82) 198(12.1,-1.82) 199(11.7,0.82) 200(11.7,-1.82)
  round 5 hole 2.5: 201(0,0) 202(0,33) 203(48,33) 204(48,0)
  silkscreen extent 10.2,-3.1 32.8,35, body extent -3.5,-3.5 51.5,36.5, height 5.01
SISH615ADN-T1-GE3-Footprint-1 [mm]
  rect 0.35x0.5 smd paste+0 mask+0: 1(-0.937,-1.4) 2(-0.288,-1.4) 3(0.363,-1.4) 4(1.012,-1.4)
  round 0.025 smd mask+0: 5-6-7-8(0.038,0.51)
  Top Layer region: -1.187,-0.63 -1.187,-0.215 -1.568,-0.215 -1.568,0.215 -1.187,0.215 -1.187,1.35 -1.137,1.35 -1.137,1.65 -0.737,1.65 -0.737,1.35 -0.487,1.35 -0.487,1.65 -0.088,1.65 -0.088,1.35 0.163,1.35 0.163,1.65 0.563,1.65 0.563,1.35 0.813,1.35 0.813,1.65 1.212,1.65 1.212,1.35 1.262,1.35 1.262,0.215 1.643,0.215 1.643,-0.215 1.262,-0.215 1.262,-0.63
  silkscreen extent -1.51,-2.37 1.59,-1.01, body extent -1.67,-1.75 1.74,1.75, height 0.25
SOIC-SN8_L [mm] "SOIC, 8-Leads, Body 4.9x3.9mm, Pitch 1.27mm, IPC High Density"
  oval 1.9x0.6 smd: 1(-2.35,1.905) 2(-2.35,0.635) 3(-2.35,-0.635) 4(-2.35,-1.905) 5(2.35,-1.905) 6(2.35,-0.635) 7(2.35,0.635) 8(2.35,1.905)
  silkscreen extent -2.47,-2.5 1,2.88, body extent -2,-2.5 2,2.5, height 1.75
SOT65P210X110-5N [mm] "SOT23, 5-Leads, Body 2.00x2.10mm, Pitch 0.65mm, IPC Medium Density"
  rect 0.8x0.4 smd: 1(-1.075,0.65) 2(-1.075,0) 3(-1.075,-0.65) 4(1.075,-0.65) 5(1.075,0.65)
  silkscreen extent -1.2,-1.1 0.3,1.52, body extent -0.67,-1.1 0.67,1.1, height 1.1
SOT95P285X140-5N [mm] "SOT23, 5-Leads, Body 3.00x2.85mm, Pitch 0.95mm, IPC Medium Density"
  rect 1.05x0.6 smd: 1(-1.375,0.95) 2(-1.375,0) 3(-1.375,-0.95) 4(1.375,-0.95) 5(1.375,0.95)
  silkscreen extent -1.5,-1.55 0.45,1.92, body extent -0.85,-1.55 0.85,1.55, height 1.4
SOT-223_M [mm] "SOT223, 4-Leads, Body 6.5x3.5mm, Pitch 2.3mm, Lead Span 7mm, IPC Low Density"
  rect 2.7x1 smd: 1(-2.95,2.3) 2(-2.95,0) 3(-2.95,-2.3)
  rect 2.7x3.3 smd: 4(2.95,0)
  silkscreen extent -3.07,-3.35 1.3,3.47, body extent -1.85,-3.35 1.85,3.35, height 1.8
T495D106M035ATE260-Footprint-1 [mm]
  rect 2.56x2.5 smd paste+0 mask+0: 1(-2.672,0) 2(2.672,0)
  silkscreen extent -5.23,-2.28 3.93,2.28, body extent -3.8,-2.15 3.8,2.15, height 3.15
T495D337K010ATE150-Footprint-1 [mm]
  rect 2.56x2.5 smd paste+0 mask+0: 1(-2.672,0) 2(2.672,0)
  silkscreen extent -5.2,-2.28 3.93,2.28, body extent -3.8,-2.15 3.8,2.15, height 3.15
T495D475K050ATE300-Footprint-1 [mm]
  rect 2.56x2.5 smd paste+0 mask+0: 1(-2.672,0) 2(2.672,0)
  silkscreen extent -5.2,-2.28 3.93,2.28, body extent -3.8,-2.15 3.8,2.15, height 3.15